# Altium PCB DivisorPotencia.PcbDoc
Units mm, origin at the board's own origin, x right, y up, seen from the top; angles counter-clockwise.
Board outline 16.1 x 12.42 mm, 2 copper layers (Top Layer, Bottom Layer); 4 components, 5 nets, 11 pads, 0 vias.
Unrouted connection lines stored in the file: 1.
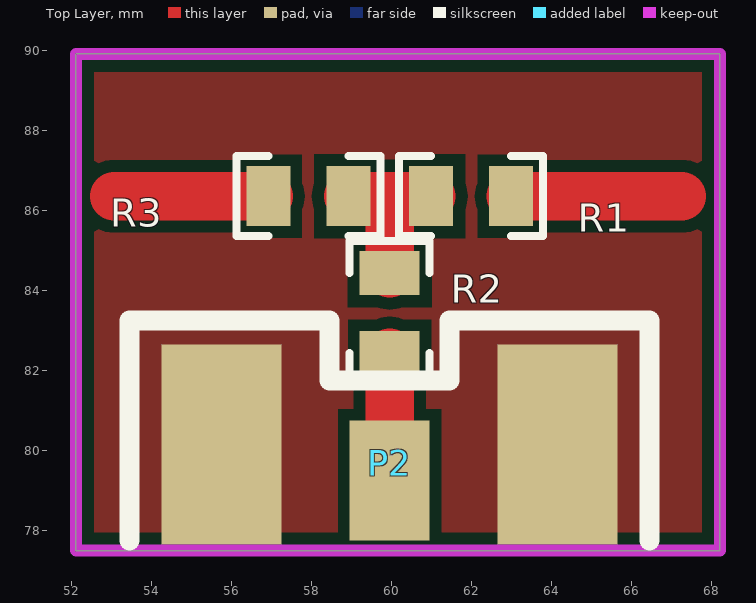
[diagram p0: Top Layer view]
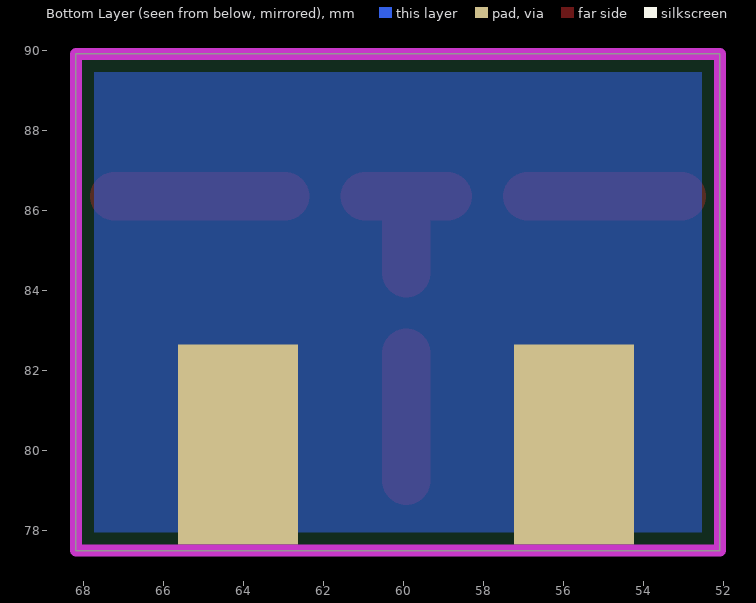
[diagram p1: Bottom Layer view, seen from below]

## Layer stack, top to bottom
Top Layer: signal copper 0.0356
Dielectric: dielectric 0.32, FR-4, Dk 4.8
Bottom Layer: signal copper 0.0356

## Board outline
52.1,77.5 52.1,89.916 68.199,89.916 68.199,77.5

## Design rules (kind name [scope] priority, off if disabled: settings)
Clearance [All] p1: gap=0.3
PolygonConnect [All] p1: connectstyle=Direct reliefconductorwidth=0.254 reliefentries=4 polygonreliefangle="90 Angle"
RoomDefinition DivisorPotResistva [InComponentClass('DivisorPotResistva')] p1: confinementstyle=ConfineIn formatcopy=TRUE lockcomponents=TRUE outline 42.545,66.675 72.517,66.675 72.517,100.203 42.545,100.203
RoutingVias [All] p1: holewidth=0.6 width=1 viastyle="Through Hole" minholewidth=0.711 minwidth=1.27 maxholewidth=0.711 maxwidth=1.27
SilkscreenOverComponentPads [All] p1: minsilkscreentomaskgap=0.254
SolderMaskExpansion [All] p1: expansion=0.102
Width [All] p1: maxlimit=2 minlimit=0.2 preferedwidth=1.219
27 further rules are at their usual default settings.

## Components (designator, comment, footprint, x,y, rotation, side; value= is the part's Value field where it differs from the comment)
P2 "SMA2" SMAL2 59.944,79.248 r180 top
R1 "Resistor" 0805_RES 61.976,86.36 r0 top
R2 "Resistor" 0805_RES 59.944,83.439 r90 top
R3 "Resistor" 0805_RES 57.912,86.36 r0 top

## Footprints (in the part's own frame and the unit in brackets; to place one, negate y for a bottom-side part, rotate by r counter-clockwise, add the part's x,y. Pads: shape width x height; smd on the part's side, far side on the other; paste and mask are expansions set on the pad)
0805_RES [mm]
  rect 1.1x1.5 smd: 1(-1,0) 2(1,0)
  silkscreen extent -1.8,-1 1.8,1, body extent -1,-0.62 1,0.63, height 0.78
SMAL2 [mm]
  rect 3x5 smd: 0(-4.2,-0.9) 0(4.2,-0.9)
  rect 3x5 smd far side: 0(-4.2,-0.9) 0(4.2,-0.9)
  rect 2x3 smd: 1(0,0)
  silkscreen extent -6.5,-4 6.5,1.5, body extent -4.76,-2.97 4.76,10.86, height 4.06

## Part data
P2: "BNC Elbow Connector"
R1 R2 R3: library part Res

## Nets (pads, with @x,y where several pads share a name; then routed paths per layer and width w, separated by ;. In a path a pad name is that pad's centre, name@x,y a point inside that pad or via, vN(x,y) a via of type N, cw(c..) or ccw(c..) an arc to the next point about the centre after c; other vN are vias at no path point)
GND: P2.0
IN: P2.1 R2.1 | length 3.2
  Top Layer w1.219: P2.1 R2.1
NetR1_1: R1.1 R2.2 R3.2 | length 4
  Top Layer w1.219: R3.2 59.944,86.36 ; R2.2 59.944,86.36 ; R1.1 59.944,86.36
OUT2: R1.2 | length 4.3
  Top Layer w1.219: R1.2 67.24,86.36
OUT3: R3.1 | length 3.9
  Top Layer w1.219: 53.059,86.36 R3.1

## Polygon pours and split planes (outlines as drawn)
GND on Top Layer "TOPGND" (solid, remove dead copper): 52.1,89.916 52.1,77.5 68.199,77.5 68.199,89.916
GND on Bottom Layer "BOTTOMGND" (solid, remove dead copper): 52.1,77.5 52.1,89.916 68.199,89.916 68.199,77.5

## Keep-outs
Keep-Out Layer:
  the board outline again, w0.3

## Dimensions
52.1,77.5 to 52.1,89.916 on Mechanical 1
52.1,77.5 to 68.199,77.5 on Mechanical 1